# Altium PCB CFD_Chip_Test.PcbDoc (part 1 of 2)
Units mil, origin at the board's own origin, x right, y up, seen from the top; angles counter-clockwise.
Board outline 3410 x 4065 mil, 4 copper layers (Top Layer, Top Plane, Bottom Plane, Bottom Layer), stack 61.356 mil thick; 119 components, 105 nets, 482 pads, 105 vias.
Unrouted connection lines stored in the file: 8.
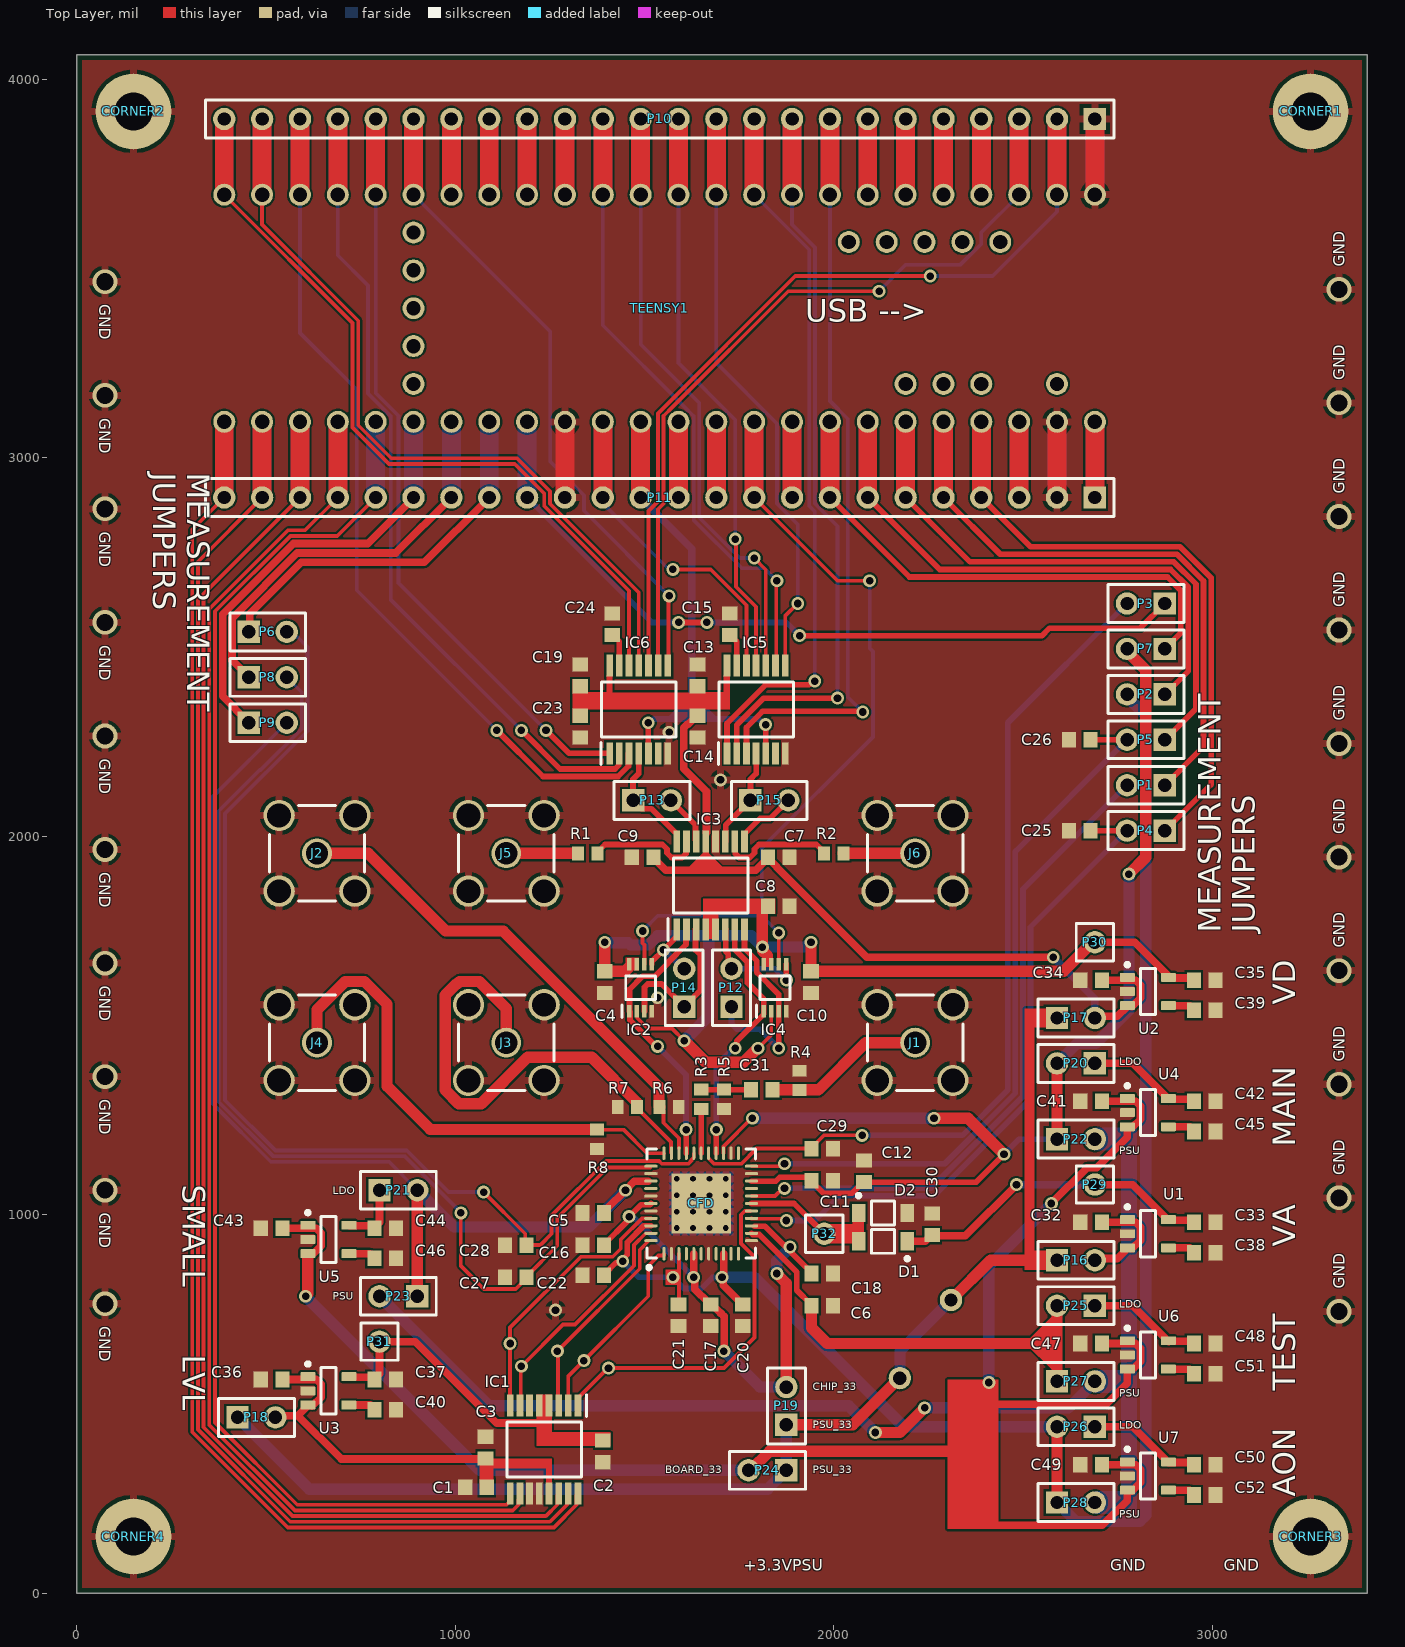
[diagram p0: Top Layer view]
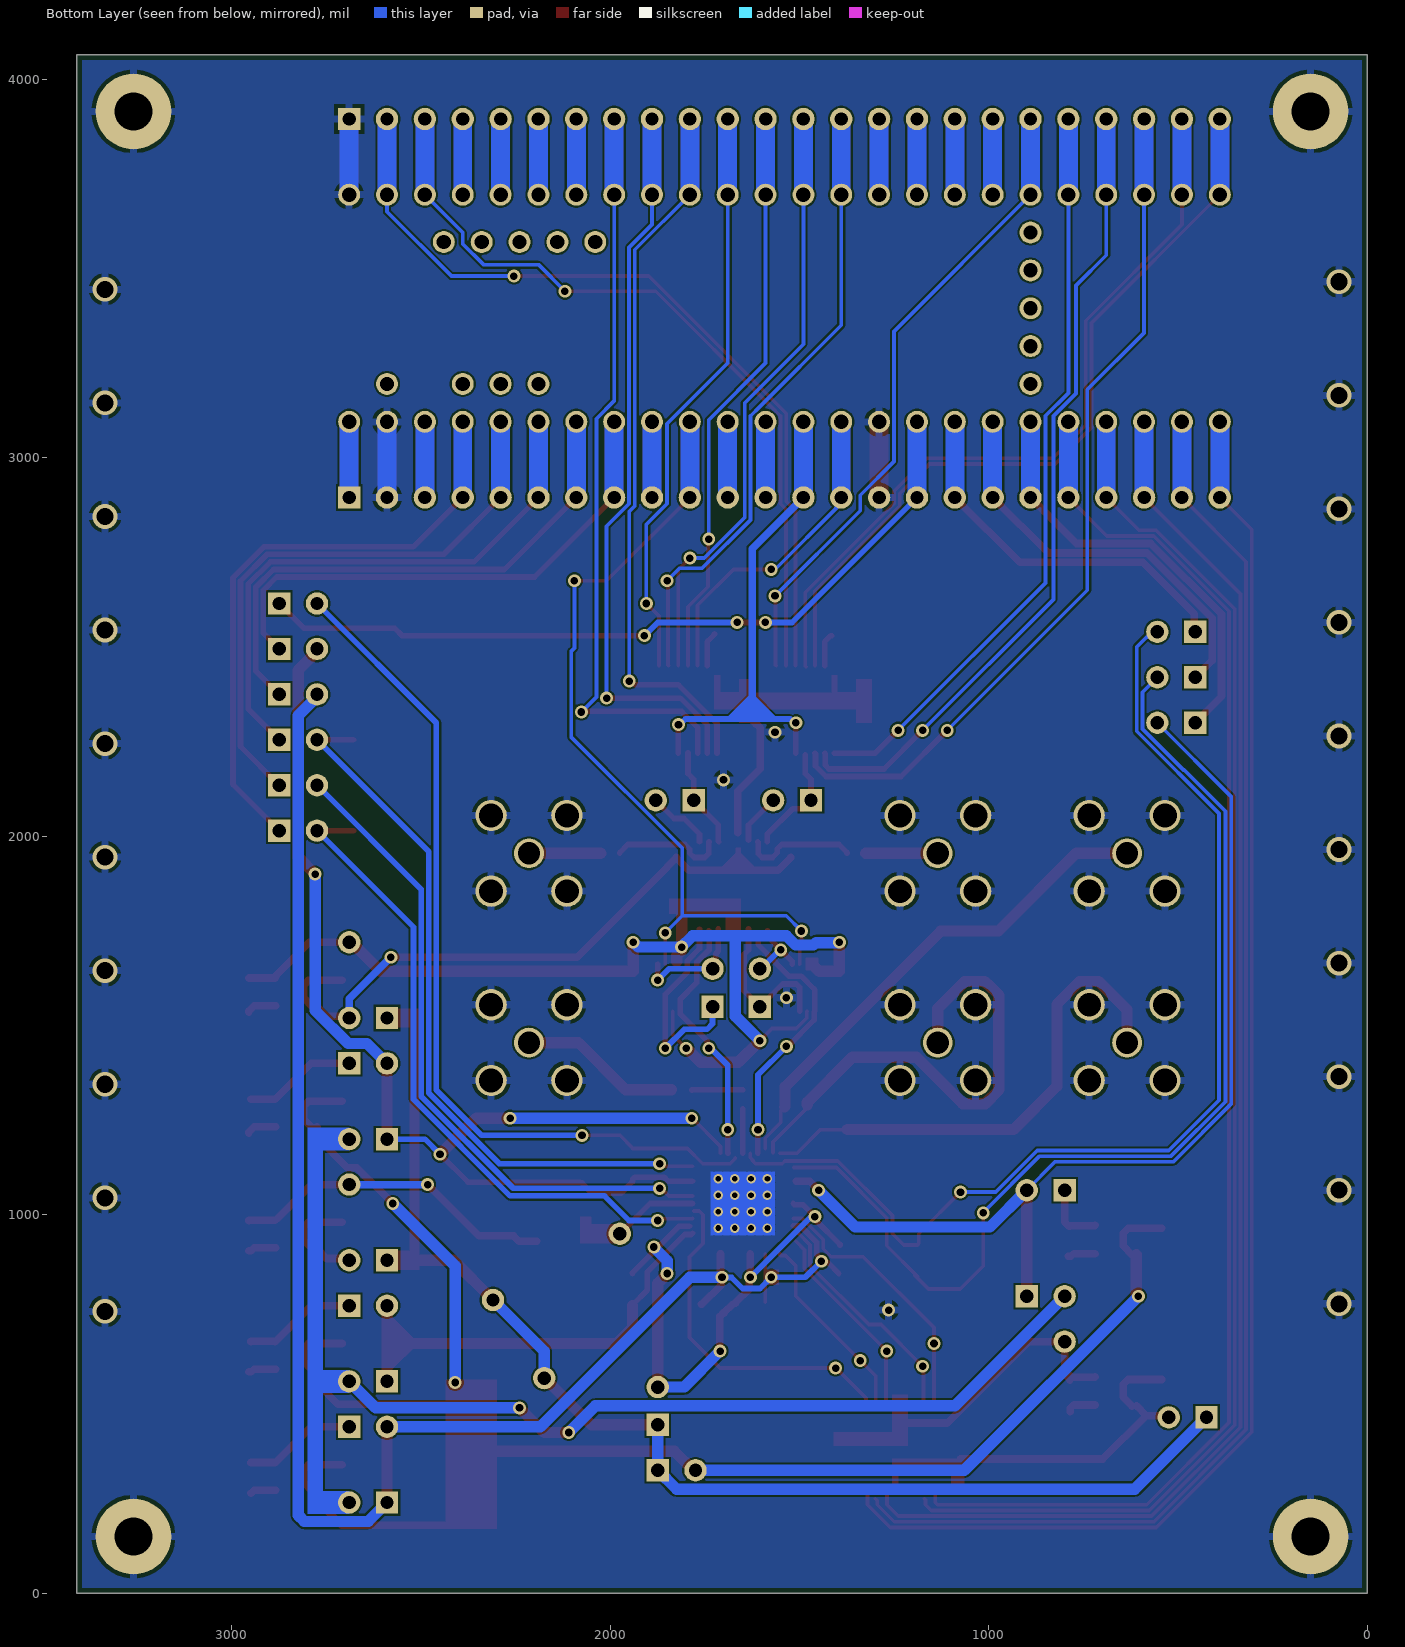
[diagram p1: Bottom Layer view, seen from below]
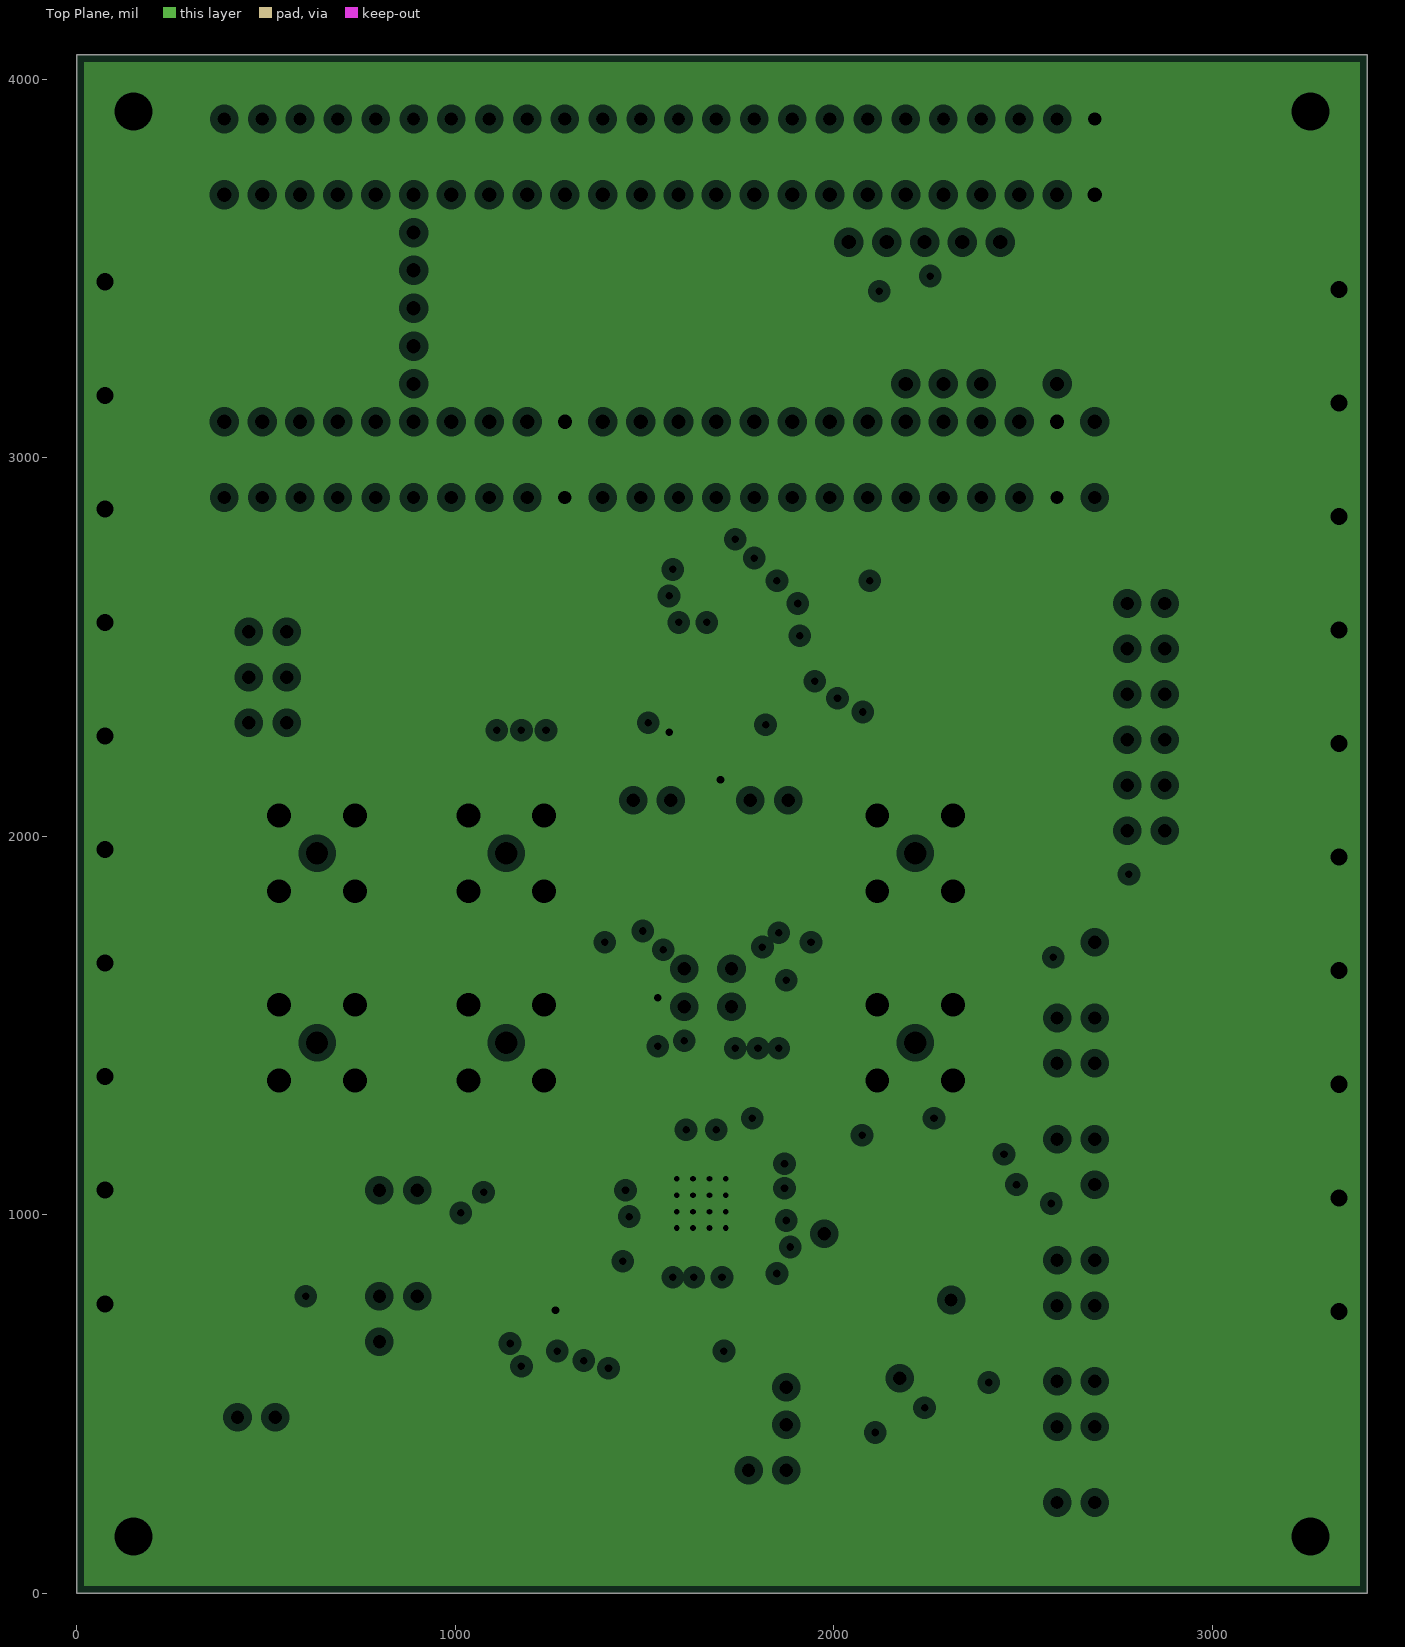
[diagram p2: Top Plane, clearances drawn from the general rule]
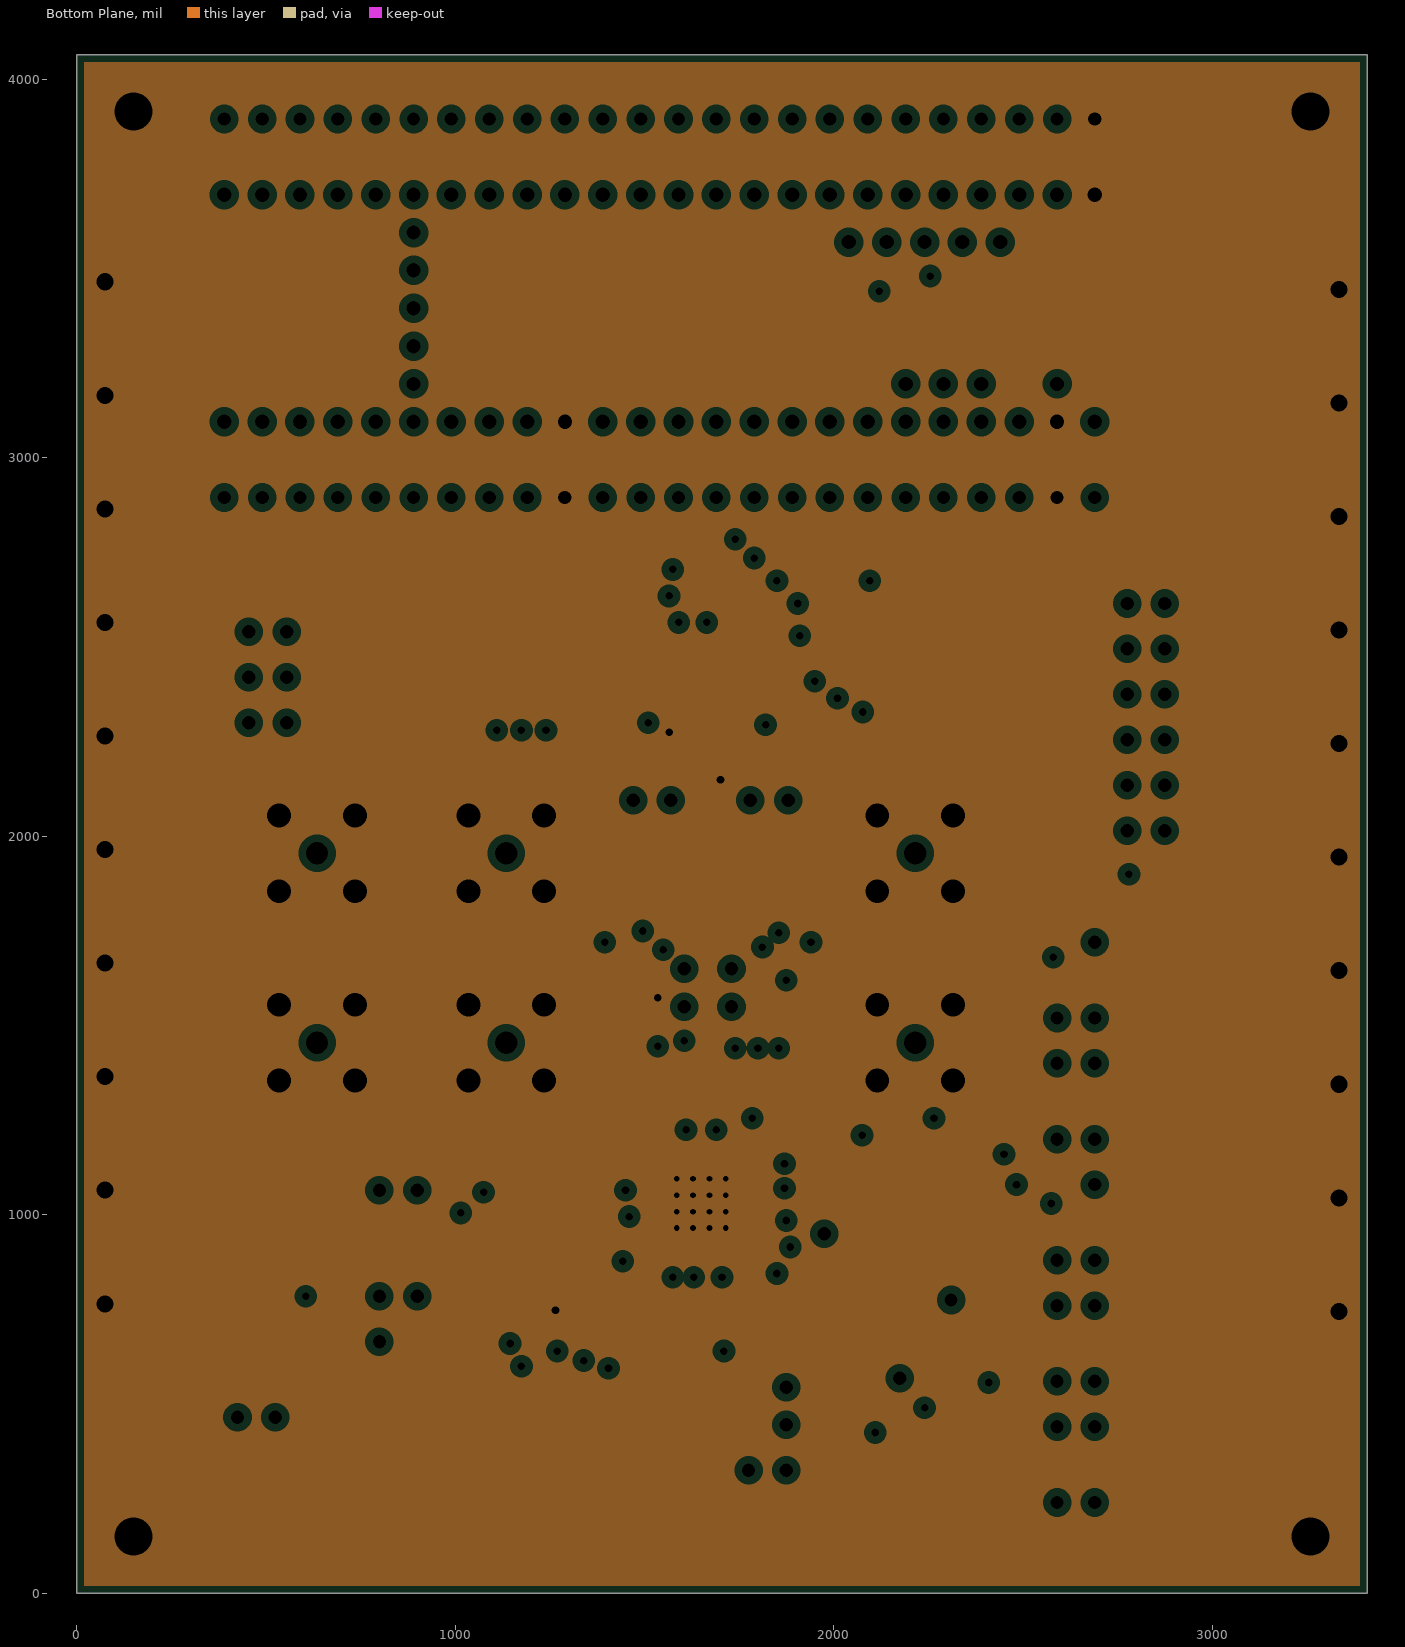
[diagram p3: Bottom Plane, clearances drawn from the general rule]
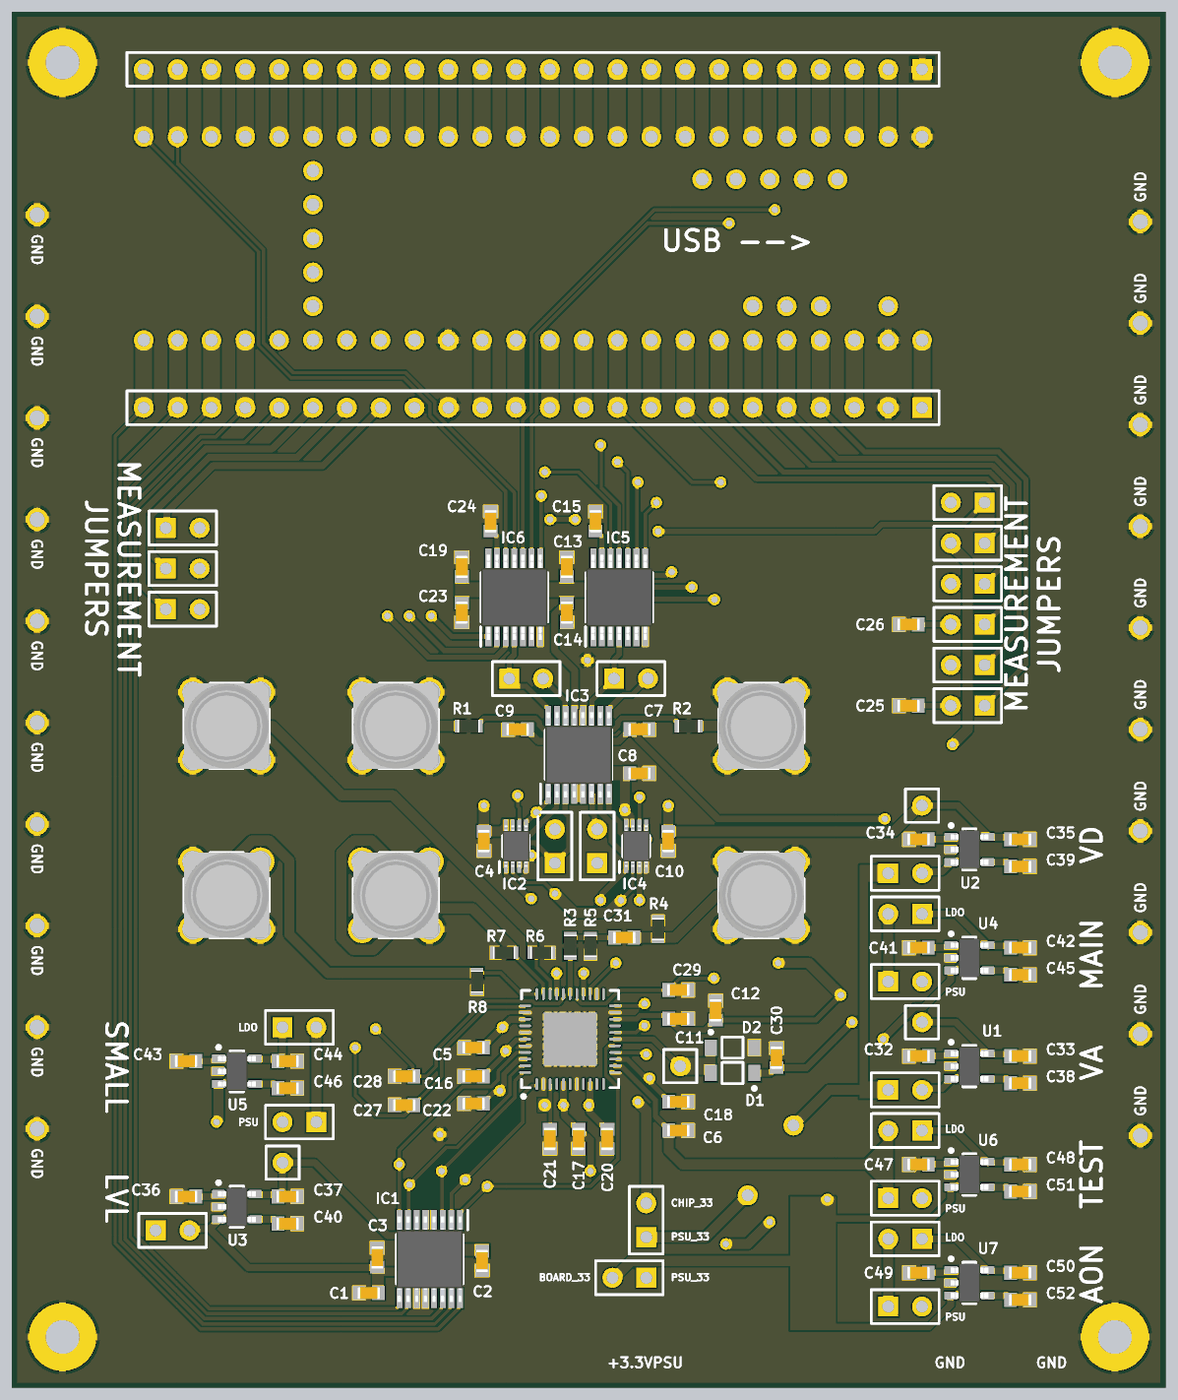
[diagram p5: 3D render of the assembled board from above, using the file's embedded part models]

## Layer stack, top to bottom
Top Solder: solder mask 0.4, Solder Resist, Dk 3.5
Top Layer: signal copper 1.4
Dielectric 4: prepreg 3.8, PP-013, Dk 4.3
Dielectric 2: prepreg 4.6, PP-016, Dk 4.4
Top Plane: plane copper 1.378, net GND
Dielectric 1: core 39, Core-042, Dk 4.6
Bottom Plane: plane copper 1.378, net GND
Dielectric 3: prepreg 4.6, PP-016, Dk 4.4
Dielectric 5: prepreg 3.8, PP-013, Dk 4.3
Bottom Layer: signal copper 1.4
Bottom Solder: solder mask 0.4, Solder Resist, Dk 3.5

## Board outline
0,0 3410,0 3410,4065 0,4065

## Design rules (kind name [scope] priority, off if disabled: settings)
AcuteAngle [All] p1: minimum=6.00000000000000E+0001 checktracksonly=FALSE
BoardOutlineClearance [All] p1: gap=15 ignorepadtopadclearanceinfootprint=FALSE
Clearance Clearance_outa_inner2 [InNamedPolygon('outa_inner2')] p1: gap=40 ignorepadtopadclearanceinfootprint=FALSE except(0: Arc-Hole Track-Hole SMDPad-Hole THPad-Hole Via-Hole Fill-Hole Poly-Hole Region-Hole Text-Hole)
Clearance Clearance_gnd_adc_vbus [InNamedPolygon('gnd_adc') vs InNet('VBUS')] p2: gap=60 ignorepadtopadclearanceinfootprint=FALSE except(0: Arc-Hole Track-Hole SMDPad-Hole THPad-Hole Via-Hole Fill-Hole Poly-Hole Region-Hole Text-Hole)
Clearance Clearance_gnd_adc [InNamedPolygon('gnd_adc')] p3: gap=20 ignorepadtopadclearanceinfootprint=FALSE except(0: Arc-Hole Track-Hole SMDPad-Hole THPad-Hole Via-Hole Fill-Hole Poly-Hole Region-Hole Text-Hole)
Clearance Clearance_dgnd [InNamedPolygon('dgnd')] p4: gap=15 ignorepadtopadclearanceinfootprint=FALSE except(0: Arc-Hole Track-Hole SMDPad-Hole THPad-Hole Via-Hole Fill-Hole Poly-Hole Region-Hole Text-Hole)
Clearance Clearance_vbus_keepout [InPolygon vs OnLayer('Keep-Out Layer')] p5: gap=20 ignorepadtopadclearanceinfootprint=FALSE except(0: Arc-Hole Track-Hole SMDPad-Hole THPad-Hole Via-Hole Fill-Hole Poly-Hole Region-Hole Text-Hole)
Clearance Clearance_vbus [InNamedPolygon('vbus')] p6: gap=60 ignorepadtopadclearanceinfootprint=FALSE except(0: Arc-Hole Track-Hole SMDPad-Hole THPad-Hole Via-Hole Fill-Hole Poly-Hole Region-Hole Text-Hole)
Clearance Clearance_gnd [InNamedPolygon('gnd')] p7: gap=10 ignorepadtopadclearanceinfootprint=FALSE except(0: Arc-Hole Track-Hole SMDPad-Hole THPad-Hole Via-Hole Fill-Hole Poly-Hole Region-Hole Text-Hole)
Clearance [All] p8: gap=5 ignorepadtopadclearanceinfootprint=FALSE except(0: Arc-Hole Track-Hole SMDPad-Hole THPad-Hole Via-Hole Fill-Hole Poly-Hole Region-Hole Text-Hole)
DiffPairsRouting [All] p1: maxlimit=25 minlimit=5 mostfreqgap=6 toplayer_minwidth=10 toplayer_maxwidth=15 toplayer_prefwidth=15 bottomlayer_minwidth=10 bottomlayer_maxwidth=15 bottomlayer_prefwidth=15 maxuncoupledlength=500
HoleSize [All] p1: absolutevalues=TRUE maxlimit=300 minlimit=10 maxpercent=80.000 minpercent=20.000
MinimumAnnularRing [All] p1: minimumring=5
MinimumSolderMaskSliver [All] p1: minsoldermaskwidth=2
PlaneClearance [All] p1: clearance=20
PlaneConnect [All] p1: planeconnectstyle=Relief reliefexpansion=5 reliefentries=4 reliefconductorwidth=10 reliefairgap=10
PolygonConnect PolygonConnect_4 [All vs IsNamedPolygon('NONET_L-01_P-001')] p1: thpad.connectstyle=Relief thpad.reliefconductorwidth=20 thpad.reliefentries=4 thpad.polygonreliefangle="90 Angle" thpad.airgapwidth=10 smdpad.connectstyle=Direct smdpad.reliefconductorwidth=10 smdpad.reliefentries=4 smdpad.polygonreliefangle="90 Angle" smdpad.airgapwidth=10 via.connectstyle=Relief via.reliefconductorwidth=20 via.reliefentries=4 via.polygonreliefangle="90 Angle" via.airgapwidth=10
PolygonConnect PolygonConnect_3 [All] p2: thpad.connectstyle=Relief thpad.reliefconductorwidth=20 thpad.reliefentries=4 thpad.polygonreliefangle="90 Angle" thpad.airgapwidth=10 smdpad.connectstyle=Direct smdpad.reliefconductorwidth=10 smdpad.reliefentries=4 smdpad.polygonreliefangle="90 Angle" smdpad.airgapwidth=10 via.connectstyle=Relief via.reliefconductorwidth=20 via.reliefentries=4 via.polygonreliefangle="90 Angle" via.airgapwidth=10
PolygonConnect PolygonConnect_2 [All vs IsNamedPolygon('NONET_L-01_P-001')] p3: thpad.connectstyle=Relief thpad.reliefconductorwidth=10 thpad.reliefentries=4 thpad.polygonreliefangle="90 Angle" thpad.airgapwidth=10 smdpad.connectstyle=Direct smdpad.reliefconductorwidth=10 smdpad.reliefentries=4 smdpad.polygonreliefangle="90 Angle" smdpad.airgapwidth=10 via.connectstyle=Relief via.reliefconductorwidth=20 via.reliefentries=4 via.polygonreliefangle="90 Angle" via.airgapwidth=10
PolygonConnect PolygonConnect_1 [All vs IsNamedPolygon('NONET_L-01_P-001')] p4: thpad.connectstyle=Relief thpad.reliefconductorwidth=10 thpad.reliefentries=4 thpad.polygonreliefangle="90 Angle" thpad.airgapwidth=10 smdpad.connectstyle=Direct smdpad.reliefconductorwidth=10 smdpad.reliefentries=4 smdpad.polygonreliefangle="90 Angle" smdpad.airgapwidth=10 via.connectstyle=Relief via.reliefconductorwidth=20 via.reliefentries=4 via.polygonreliefangle="90 Angle" via.airgapwidth=10
PolygonConnect [All] p5: connectstyle=Relief reliefconductorwidth=6 reliefentries=4 polygonreliefangle="90 Angle" airgapwidth=6
RoutingVias [All] p1: holewidth=12 width=24 viastyle="Through Hole" minholewidth=10 minwidth=22 maxholewidth=200 maxwidth=200
SilkToSilkClearance [All] p1: silktosilkclearance=5
SilkToSolderMaskClearance [IsPad] p1: minsilkscreentomaskgap=3 clearancetoexposedcopper=FALSE
SolderMaskExpansion [All] p1: expansion=2.2 istentingtop=FALSE
Width [All] p1: maxlimit=1000 minlimit=5 preferedwidth=10 minimp=50.000000 maximp=50.000000 favimp=50.000000
23 further rules are at their usual default settings.

## Classes and differential pairs
component class Teensy_Interface: C1 C2 C3 IC1 P1 P2 P3 P4 P5 P6 P7 P8 P9 P10 P11 TEENSY1
component class Power: C32 C33 C34 C35 C36 C37 C38 C39 C40 C41 C42 C43 C44 C45 C46 C47 C48 C49 C50 C51 C52 CORNER1 CORNER2 CORNER3 CORNER4 P16 P17 P18 P20 P21 P22 P23 P24 P25 P26 P27 P28 P29 P30 P31 U1 U2 U3 U4 U5 U6 U7
component class Chip_Inputs: C30 C31 D1 D2 J1 J2 J3 J4 P32 R3 R4 R5 R6 R7 R8
component class Chip: C4 C5 C6 C7 C8 C9 C10 C11 C12 C13 C14 C15 C16 C17 C18 C19 C20 C21 C22 C23 C24 C25 C26 C27 C28 C29 CFD IC2 IC3 IC4 IC5 IC6 J5 J6 P12 P13 P14 P15 R1 R2

## Components (designator, comment, footprint, x,y, rotation, side; value= is the part's Value field where it differs from the comment)
C1 "1uF" CAPC1608X90X35ML10T15 1055,280 r0 top
C2 "100nF" CAPC1608X90X35ML10T15 1390,375 r270 top
C3 "100nF" CAPC1608X90X35ML10T15 1080,385 r270 top
C4 "10nF" CAPC1608X90X35ML10T15 1395,1615 r90 top
C5 "10nF" CAPC1608X90X35ML10T15 1365,1005 r0 top
C6 "10nF" CAPC1608X90X35ML10T15 1970,760 r0 top
C7 "10nF" CAPC1608X90X35ML10T15 1855,1945 r180 top
C8 "100nF" CAPC1608X90X35ML10T15 1855,1815 r180 top
C9 "100nF" CAPC1608X90X35ML10T15 1495,1945 r0 top
C10 "10nF" CAPC1608X90X35ML10T15 1940,1615 r90 top
C11 "10nF" CAPC1608X90X35ML10T15 1970,1090 r180 top
C12 "10nF" CAPC1608X90X35ML10T15 2080,1115 r270 top
C13 "1uF" CAPC1608X90X35ML10T15 1640,2425 r90 top
C14 "100nF" CAPC1608X90X35ML10T15 1640,2290 r270 top
C15 "1uF" CAPC1608X90X35ML10T15 1725,2560 r90 top
C16 "10nF" CAPC1608X90X35ML10T15 1365,920 r0 top
C17 "10nF" CAPC1608X90X35ML10T15 1675,735 r90 top
C18 "10nF" CAPC1608X90X35ML10T15 1970,845 r180 top
C19 "1uF" CAPC1608X90X35ML10T15 1330,2425 r90 top
C20 "10nF" CAPC1608X90X35ML10T15 1760,735 r90 top
C21 "10nF" CAPC1608X90X35ML10T15 1590,735 r90 top
C22 "10nF" CAPC1608X90X35ML10T15 1365,840 r0 top
C23 "100nF" CAPC1608X90X35ML10T15 1330,2290 r270 top
C24 "1uF" CAPC1608X90X35ML10T15 1415,2560 r90 top
C25 "(10nF)" CAPC1608X90X35ML10T15 2650,2015 r0 top
C26 "(10nF)" CAPC1608X90X35ML10T15 2650,2255 r0 top
C27 "(10nF)" CAPC1608X90X35ML10T15 1160,835 r0 top
C28 "(10nF)" CAPC1608X90X35ML10T15 1160,920 r0 top
C29 "(10nF)" CAPC1608X90X35ML10T15 1970,1175 r180 top
C30 "10nF" CAPC1608X90X35ML10T15 2260,975 r270 top
C31 "2pF-20pF" CAPC1608X90X35ML10T15 1810,1330 r0 top
C32 "(Value)" CAPC1608X90X35ML10T15 2680,980 r180 top
C33 "(Value)" CAPC1608X90X35ML10T15 2980,980 r0 top
C34 "(Value)" CAPC1608X90X35ML10T15 2680,1620 r180 top
C35 "(Value)" CAPC1608X90X35ML10T15 2980,1620 r0 top
C36 "(Value)" CAPC1608X90X35ML10T15 515,565 r180 top
C37 "(Value)" CAPC1608X90X35ML10T15 815,565 r0 top
C38 "(Value)" CAPC1608X90X35ML10T15 2980,900 r0 top
C39 "(Value)" CAPC1608X90X35ML10T15 2980,1540 r0 top
C40 "(Value)" CAPC1608X90X35ML10T15 815,485 r0 top
C41 "(Value)" CAPC1608X90X35ML10T15 2680,1300 r180 top
C42 "(Value)" CAPC1608X90X35ML10T15 2980,1300 r0 top
C43 "(Value)" CAPC1608X90X35ML10T15 515,965 r180 top
C44 "(Value)" CAPC1608X90X35ML10T15 815,965 r0 top
C45 "(Value)" CAPC1608X90X35ML10T15 2980,1220 r0 top
C46 "(Value)" CAPC1608X90X35ML10T15 815,885 r0 top
C47 "(Value)" CAPC1608X90X35ML10T15 2680,660 r180 top
C48 "(Value)" CAPC1608X90X35ML10T15 2980,660 r0 top
C49 "(Value)" CAPC1608X90X35ML10T15 2680,340 r180 top
C50 "(Value)" CAPC1608X90X35ML10T15 2980,340 r0 top
C51 "(Value)" CAPC1608X90X35ML10T15 2980,580 r0 top
C52 "(Value)" CAPC1608X90X35ML10T15 2980,260 r0 top
CFD "CFD_package" QFN50P700X700X80_HS-45N_WIDEVIAS 1650,1030 r90 top
CORNER1 "Corner Mount" CornerMount 3260,3915 r90 top
CORNER2 "Corner Mount" CornerMount 150,3915 r90 top
CORNER3 "Corner Mount" CornerMount 3260,150 r90 top
CORNER4 "Corner Mount" CornerMount 150,150 r90 top
D1 "" ONSC-SOD-123-2-425-04_V 2130,930 r180 top
D2 "" ONSC-SOD-123-2-425-04_V 2130,1005 r0 top
IC1 "MAX13003EEUE+" SOP65P640X110-16N 1235,380 r270 top
IC2 "NL17SZ74USG" SOP50P310X90-8N 1490,1600 r90 top
IC3 "MAX13003EEUE+" SOP65P640X110-16N 1675,1870 r90 top
IC4 "NL17SZ74USG" SOP50P310X90-8N 1845,1600 r90 top
IC5 "TDC7200PWR" SOP65P640X120-14N 1795,2335 r90 top
IC6 "TDC7200PWR" SOP65P640X120-14N 1485,2335 r90 top
J1 "5-1814832-1" TECO-5-1814832-1_V 2215,1455 r0 top
J2 "5-1814832-1" TECO-5-1814832-1_V 635,1955 r0 top
J3 "5-1814832-1" TECO-5-1814832-1_V 1135,1455 r0 top
J4 "5-1814832-1" TECO-5-1814832-1_V 635,1455 r0 top
J5 "5-1814832-1" TECO-5-1814832-1_V 1135,1955 r0 top
J6 "5-1814832-1" TECO-5-1814832-1_V 2215,1955 r0 top
P1 "Header 2" HDR1X2 2875,2135 r180 top
P2 "Header 2" HDR1X2 2875,2375 r180 top
P3 "Header 2" HDR1X2 2875,2615 r180 top
P4 "Header 2" HDR1X2 2875,2015 r180 top
P5 "Header 2" HDR1X2 2875,2255 r180 top
P6 "Header 2" HDR1X2 455,2540 r0 top
P7 "Header 2" HDR1X2 2875,2495 r180 top
P8 "Header 2" HDR1X2 455,2420 r0 top
P9 "Header 2" HDR1X2 455,2300 r0 top
P10 "Header 24" HDR1X24 2690,3895 r180 top
P11 "Header 24" HDR1X24 2690,2895 r180 top
P12 "Header 2" HDR1X2 1730,1550 r90 top
P13 "Header 2" HDR1X2 1470,2095 r0 top
P14 "Header 2" HDR1X2 1605,1550 r90 top
P15 "Header 2" HDR1X2 1780,2095 r0 top
P16 "Header 2" HDR1X2 2590,880 r0 top
P17 "Header 2" HDR1X2 2590,1520 r0 top
P18 "Header 2" HDR1X2 425,465 r0 top
P19 "Header 2" HDR1X2 1875,445 r90 top
P20 "Header 2" HDR1X2 2690,1400 r180 top
P21 "Header 2" HDR1X2 800,1065 r0 top
P22 "Header 2" HDR1X2 2590,1200 r0 top
P23 "Header 2" HDR1X2 900,785 r180 top
P24 "Header 2" HDR1X2 1875,325 r180 top
P25 "Header 2" HDR1X2 2690,760 r180 top
P26 "Header 2" HDR1X2 2690,440 r180 top
P27 "Header 2" HDR1X2 2590,560 r0 top
P28 "Header 2" HDR1X2 2590,240 r0 top
P29 "Header 1" Header1 2690,1080 r0 top
P30 "Header 1" Header1 2690,1720 r0 top
P31 "Header 1" Header1 800,665 r0 top
P32 "Header 1" Header1 1975,950 r0 top
R1 "(<50Ohm)" RESC1609X50X30NL8T20 1350,1955 r0 top
R2 "(<50Ohm)" RESC1609X50X30NL8T20 2000,1955 r180 top
R3 "(0/50Ohm)" RESC1609X50X30NL8T20 1650,1305 r90 top
R4 "(50Ohm)" RESC1609X50X30NL8T20 1910,1355 r270 top
R5 "(50Ohm)" RESC1609X50X30NL8T20 1710,1305 r90 top
R6 "(50Ohm)" RESC1609X50X30NL8T20 1565,1285 r180 top
R7 "(50Ohm)" RESC1609X50X30NL8T20 1455,1285 r0 top
R8 "(50Ohm)" RESC1609X50X30NL8T20 1375,1200 r90 top
TEENSY1 "TEENSY_3.5/3.6" TEENSY_3.5/3.6 1590,3395 r180 top
U1 "TPS73218DBVT" DBV0005A_N 2830,950 r0 top
U2 "TPS73218DBVT" DBV0005A_N 2830,1590 r0 top
U3 "TPS73218DBVT" DBV0005A_N 665,535 r0 top
U4 "TPS73218DBVT" DBV0005A_N 2830,1270 r0 top
U5 "TPS73218DBVT" DBV0005A_N 665,935 r0 top
U6 "TPS73218DBVT" DBV0005A_N 2830,630 r0 top
U7 "TPS73218DBVT" DBV0005A_N 2830,310 r0 top

## Footprints (in the part's own frame and the unit in brackets; to place one, negate y for a bottom-side part, rotate by r counter-clockwise, add the part's x,y. Pads: shape width x height; smd on the part's side, far side on the other; paste and mask are expansions set on the pad)
CAPC1608X90X35ML10T15 [mm] "Chip Capacitor, 2-Leads, Body 1.7x0.9mm, IPC Low Density"
  rect 0.95x1.05 smd: 1(-0.725,0) 2(0.725,0)
  body extent -0.85,-0.45 0.85,0.45, height 0.9
CornerMount [mil] "Ideally grounded mounting hole for board corners. 150mil distance."
  round 200 hole 100: 1(0,0)
DBV0005A_N [mm] "SOT23, 5-Leads, Body 3.05x1.75mm, Pitch 0.95mm, IPC Medium Density"
  rrect17% 1x0.6 smd: 1(-1.375,0.95) 2(-1.375,0) 3(-1.375,-0.95) 4(1.375,-0.95) 5(1.375,0.95)
  silkscreen extent -1.5,-1.55 0.5,1.92, body extent -1.42,-1.46 1.42,1.46, height 1.08
HDR1X2 [mm] "Connector; Header; 2 Position"
  rect 1.5x1.5 hole 0.9: 1(0,0)
  round 1.5 hole 0.9: 2(2.54,0)
  silkscreen extent -1.27,-1.27 3.81,1.27
HDR1X24 [mm] "Connector; Header; 24 Position"
  rect 1.5x1.5 hole 0.9: 1(0,0)
  round 1.5 hole 0.9: 2(2.54,0) 3(5.08,0) 4(7.62,0) 5(10.16,0) 6(12.7,0) 7(15.24,0) 8(17.78,0) 9(20.32,0) 10(22.86,0) 11(25.4,0) 12(27.94,0) 13(30.48,0) 14(33.02,0) 15(35.56,0) 16(38.1,0) 17(40.64,0) 18(43.18,0) 19(45.72,0) 20(48.26,0) 21(50.8,0) 22(53.34,0) 23(55.88,0) 24(58.42,0)
  silkscreen extent -1.27,-1.27 59.69,1.27
Header1 [mm] "Single header connection"
  round 1.5 hole 0.9 mask+0.056: 1(0,0)
  silkscreen extent -1.25,-1.25 1.25,1.25
ONSC-SOD-123-2-425-04_V [mm] "SOD, 2-Leads, Body 2.69x1.6mm"
  rect 0.91x1.22 smd: 1(-1.635,0) 2(1.635,0)
  silkscreen extent -1.76,-0.8 0.78,1.28, body extent -1.35,-0.8 1.35,0.8, height 1.35
QFN50P700X700X80_HS-45N_WIDEVIAS [mm] "QFN, 44-Leads, Body 7.00x7.00mm, Pitch 0.50mm, Thermal Pad 4.00x4.00mm, IPC Medium Density"
  oval 0.9x0.2 smd: 1(-3.375,2.5) 2(-3.375,2) 3(-3.375,1.5) 4(-3.375,1) 5(-3.375,0.5) 6(-3.375,0) 7(-3.375,-0.5) 8(-3.375,-1) 9(-3.375,-1.5) 10(-3.375,-2) 11(-3.375,-2.5) 23(3.375,-2.5) 24(3.375,-2) 25(3.375,-1.5) 26(3.375,-1) 27(3.375,-0.5) 28(3.375,0) 29(3.375,0.5) 30(3.375,1) 31(3.375,1.5) 32(3.375,2) 33(3.375,2.5)
  oval 0.2x0.9 smd: 12(-2.5,-3.375) 13(-2,-3.375) 14(-1.5,-3.375) 15(-1,-3.375) 16(-0.5,-3.375) 17(0,-3.375) 18(0.5,-3.375) 19(1,-3.375) 20(1.5,-3.375) 21(2,-3.375) 22(2.5,-3.375) 34(2.5,3.375) 35(2,3.375) 36(1.5,3.375) 37(1,3.375) 38(0.5,3.375) 39(0,3.375) 40(-0.5,3.375) 41(-1,3.375) 42(-1.5,3.375) 43(-2,3.375) 44(-2.5,3.375)
  rect 4x4 smd: 35(0,0)
  silkscreen extent -4.42,-3.65 3.65,3.65, body extent -3.5,-3.5 3.5,3.5, height 0.8
RESC1609X50X30NL8T20 [mm] "Chip Resistor, 2-Leads, Body 1.65x0.95mm, IPC Medium Density"
  rect 0.8x0.95 smd: 1(-0.65,0) 2(0.65,0)
  body extent -0.82,-0.48 0.82,0.48, height 0.5
SOP50P310X90-8N [mm]
  rect 0.85x0.3 smd: 1(-1.575,0.75) 2(-1.575,0.25) 3(-1.575,-0.25) 4(-1.575,-0.75) 5(1.575,-0.75) 6(1.575,-0.25) 7(1.575,0.25) 8(1.575,0.75)
  silkscreen extent -2,-1 0.8,1.25, body extent -1.55,-1 1.55,1, height 0.9
SOP65P640X110-16N [mm]
  rect 1.475x0.45 smd: 1(-2.938,2.275) 2(-2.938,1.625) 3(-2.938,0.975) 4(-2.938,0.325) 5(-2.938,-0.325) 6(-2.938,-0.975) 7(-2.938,-1.625) 8(-2.938,-2.275) 9(2.938,-2.275) 10(2.938,-1.625) 11(2.938,-0.975) 12(2.938,-0.325) 13(2.938,0.325) 14(2.938,0.975) 15(2.938,1.625) 16(2.938,2.275)
  silkscreen extent -3.67,-2.5 1.85,2.85, body extent -3.2,-2.5 3.2,2.5, height 1.1
SOP65P640X120-14N [mm]
  rect 1.475x0.45 smd: 1(-2.938,1.95) 2(-2.938,1.3) 3(-2.938,0.65) 4(-2.938,0) 5(-2.938,-0.65) 6(-2.938,-1.3) 7(-2.938,-1.95) 8(2.938,-1.95) 9(2.938,-1.3) 10(2.938,-0.65) 11(2.938,0) 12(2.938,0.65) 13(2.938,1.3) 14(2.938,1.95)
  silkscreen extent -3.67,-2.5 1.85,2.52, body extent -3.2,-2.5 3.2,2.5, height 1.13
TECO-5-1814832-1_V [mm] "THD, 5-Leads, Body 6.4x6.4mm, Pitch 5.08mm"
  round 2 hole 1.5: 1(0,0)
  round 2.1 hole 1.6: 2(-2.54,2.54) 3(-2.54,-2.54) 4(2.54,-2.54) 5(2.54,2.54)
  silkscreen extent -3.2,-3.2 3.2,3.2, body extent -3.21,-3.21 3.19,3.19, height 9.5
TEENSY_3.5/3.6 [mil]
  round 58 / inner round 60 / far side round 58 hole 38: 0/RX(-1000,-300) 1/TX(-900,-300) 2(-800,-300) 3/CANTX(-700,-300) 3V3(300,-300) 3V3_2(700,-100) 3V3_LO(-900,300) 4/CANRX(-600,-300) 5(-500,-300) 6(-400,-300) 7(-300,-300) 8(-200,-300) 9/CS(-100,-300) 10/CS(0,-300) 11/MOSI(100,-300) 12/MISO(200,-300) 13/SCK(200,300) 14/A0(100,300) 15/A1(0,300) 16/A2(-100,300) 17/A3(-200,300) 18/A4/SDA(-300,300) 19/A5/SCL(-400,300) 20/A6(-500,300) 21/A7(-600,300) 21/DAC0(500,300) 22/A8(-700,300) 23/A9(-800,300) 24(400,-300) 25(500,-300) 26(600,-300) 27(700,-300) 28(800,-300) 29(900,-300) 30(1000,-300) 31/A12(1100,-300) 32/A13(1200,-300) 33/A14(1200,300) 34/A15(1100,300) 35/A16(1000,300) 36/A17(900,300) 37/A18(800,300) 38/A19(700,300) 39/A20(600,300) A10(-700,200) A11(-600,200) A22/DAC1(400,300) AGND(-1000,300) AREF(-800,200) GND(-1100,-300) GND2(300,300) GND3(700,0) PROG(700,100) RESET(700,200) U5V(-850,-175) UD+(-650,-175) UD-(-750,-175) UGND1(-550,-175) UGND2(-450,-175) VBAT(700,-200) VIN(-1100,300) VUSB(-1000,200)

## Part data
C1 C2 C3 C4 C5 C6 C7 C8 C9 C10 C11 C12 C13 C14 C15 C16 C17 C18 C19 C20 C21 C22 C23 C24 C25 C26 C27 C28 C29 C30 C31 C32 C33 C34 C35 C36 C37 C38 C39 C40 C41 C42 C43 C44 C45 C46 C47 C48 C49 C50 C51 C52: library part CMP-2000-04945-1, "0603", Capacitance=22pF, Dielectric=C0G, Manufacturer=Murata, Package Description="2-Pin Surface Mount Device, Body 1.6 x 0.8 mm", Package Reference=603, Rated Voltage=50V, Tolerance (%)=±5%, Case Size/Dimension=0603, Datasheet URL=https://datasheet.ciiva.com/11786/0900766b807a1cab-11786398.pdf, Datasheet Version=Jul-06, Manufacturer URL=http://www.murata.com/
D1 D2: library part CMP-1060-00509-1, "Zener Voltage Regulator, 2-Pin SOD-123, Pb-Free, Tape and Reel", Manufacturer="On Semiconductor", PartNumber=MMSZ4679T1G, ComponentLink1Description="Manufacturer URL", ComponentLink1URL=http://www.onsemi.com/, ComponentLink2Description=Datasheet, ComponentLink2URL=http://www.onsemi.com/pub_link/Collateral/MMSZ4678T1-D.PDF, ComponentLink3Description="Package Specification", ComponentLink3URL=http://www.onsemi.com/pub_link/Collateral/425-04.PDF, DatasheetVersion="Rev. 9", Mounting Technology="Surface Mount", P Max (W)=0.5, PackageDescription="2-Pin SOD, Body 1.6 x 2.69 mm", PackageReference=SOD-123-2-425-04, PackageVersion="Rev. G, 10/2009", Packing="Tape and Reel", RoHS=Pb-Free, VZ Typ (V)=2
IC1 IC3: "Integrated Circuit", Manufacturer_Name="Maxim Integrated", Datasheet Link=https://pdfserv.maximintegrated.com/en/ds/MAX13000E-MAX13005E.pdf, Height=1.1mm, Manufacturer_Part_Number=MAX13003EEUE+
IC2 IC4: "Flip Flops 1.65-5.5V CMOS Single D-Type", Manufacturer_Name="ON Semiconductor", Datasheet Link=http://www.onsemi.com/pub/Collateral/NL17SZ74-D.PDF, Height=0.9mm, Manufacturer_Part_Number=NL17SZ74USG
IC5 IC6: "Integrated Circuit", Manufacturer_Name="Texas Instruments", Datasheet Link=http://www.ti.com/lit/gpn/tdc7200, Height=1.2mm, Manufacturer_Part_Number=TDC7200PWR
J1 J2 J3 J4 J5 J6: library part CMP-2000-05415-1, "SMA Connector, Pitch 5.08 mm, 1 Position, Height 9.5 mm, Tail Length 4 mm, -65 to 165 degC, RoHS, Bulk", Frequency Max=3GHz, Manufacturer="TE Connectivity", Package Description="SMA Connector, Pitch 5.08 mm, 1 Position, Height 9.5 mm, Tail Length 4 mm", Coaxial Cable Types=-, Coaxial Termination=Solder, Connector Body Style=StraightJack, Connector Mounting=PCBMount, Connector Type=SMACoaxial, Contact Material=BerylliumCopper, Contact Plating=GoldPlatedContacts, Datasheet URL=http://www.onlinecomponents.com/productFiles/mf-AMP/eng_cd_1814832_a.pdf, Datasheet Version="Rev. B1, 03/2011", Impedance=50ohm, Manufacturer URL=http://www.te.com/, Package Reference=5-1814832-1, Product Range=ZDCSeries, SVHC=NoSVHC(15-Jun-2015)
P1 P2 P3 P4 P5 P6 P7 P8 P9 P12 P13 P14 P15 P16 P17 P18 P19 P20 P21 P22 P23 P24 P25 P26 P27 P28: "Header, 2-Pin", LatestRevisionDate=17-Jul-2002, LatestRevisionNote="Re-released for DXP Platform.", Publisher="Altium Limited"
P10 P11: "Header, 24-Pin", LatestRevisionDate=17-Jul-2002, LatestRevisionNote="Re-released for DXP Platform.", Publisher="Altium Limited"
R1 R2 R3 R4 R5 R6 R7 R8: library part CMP-2000-03816-5, "0603", Manufacturer="Vishay Semiconductor", Max Operating Temperature="155 degC", Min Operating Temperature="-55 degC", Package Quantity=5000, Voltage Rating="75 V", ComponentLink1Description="Manufacturer URL", ComponentLink1URL=http://www.vishay.com/, ComponentLink2Description=Datasheet, ComponentLink2URL=http://www.vishay.com/docs/20035/dcrcwe3.pdf, DatasheetVersion=06/2012, Height="0.45 mm", Length="1.55 mm", Mount="Surface Mount", Mounting Technology="Surface Mount", PackageDescription="2-Pin Surface Mount Device, Body 1.575 x 0.85 mm", PackageReference=0603, Packaging="Tape and Reel", Pins=2, REACH SVHC=Unknown, RoHSCompliant=true
U1 U2 U3 U4 U5 U6 U7: library part CMP-0394-00378-2, "Single Output Fast Transient Response LDO, 200 mA, Fixed 1.8 V Output, 1.7 to 5.5 V Input, with Reverse Current Protection, 5-pin SOT-23 (DBV), -40 to 85 degC, Green (RoHS & no Sb/Br)", Manufacturer="Texas Instruments", Accuracy(%)=1, Code_JEDEC=MO-178, ComponentLink1Description="Manufacturer URL", ComponentLink1URL=http://www.ti.com/, ComponentLink2Description=Datasheet, ComponentLink2URL=http://www.ti.com/general/docs/lit/getliterature.tsp?genericPartNumber=TPS73218&fileType=pdf, ComponentLink3Description="Package Specification", ComponentLink3URL=http://www.ti.com/litv/pdf/mpds018i, DatasheetVersion=SBVS037O, Eco-Plan="Green (RoHS & no Sb/Br)", Fixed Output Options(V)=1.8, Iout(Max)(A)=0.25, Iq(Typ)(mA)=0.4, Mounting Technology="Surface Mount", PackageDescription="5-Pin Plastic Small Outline, Body 1.60 Ãƒâ€” 2.90 mm, Pitch 0.95 mm", PackageReference=DBV0005A, PackageVersion=4073253-4/K, PartNumber=TPS73218DBVT, SubFamily="Single Channel LDO", Vdo(Typ)(mV)=40, Vin(Max)(V)=5.5, Vin(Min)(V)=1.7, Vout Adj(Max)(V)=1.8, Vout Adj(Min)(V)=1.8
TEENSY1: DeviceSetName=TEENSY_3.5/3.6, GateName_1=G$1, LibraryName=Teensy356, Package=TEENSY_3.5/3.6, SymbolName_1=TEENSY_3.5/3.6

## Free pads (board coordinates)
  round 59.06 hole 35.43: ""(2174.74,568.66) ""(2310,775)

## Via types
v1: diameter 34, hole 20, Top Layer to Bottom Layer, 69 vias
v2: diameter 65, hole 45, Top Layer to Bottom Layer, 20 vias
v3: diameter 25, hole 15, Top Layer to Bottom Layer, 16 vias

## Nets (pads, with @x,y where several pads share a name; then routed paths per layer and width w, separated by ;. In a path a pad name is that pad's centre, name@x,y a point inside that pad or via, vN(x,y) a via of type N, cw(c..) or ccw(c..) an arc to the next point about the centre after c; other vN are vias at no path point)
+1.8VA: C30.2 C33.1 D1.1 P29.1 U1.5 | length 852.8
  Top Layer w20: D1.1@2194.37,930 2241.57,930 2255,943.43 C30.2@2255,945 ; C30.2@2260,945 2348,945 v1(2483,1080) ; P29.1@2690,1080 2790,1080 U1.5@2880,990 ; U1.5@2884.13,987.4 2885.94,985.59 2954.41,985.59 C33.1@2955,985
  Bottom Layer w20: v1(2483,1080) P29.1@2690,1080
+1.8VD: C4.2 C8.2 C10.2 C35.1 IC2.2 IC2.7 IC2.8 IC3.4 IC3.5 IC4.2 IC4.7 IC4.8 P30.1 U2.5 | length 2855.8
  Top Layer w10: IC2.2@1480.16,1537.99 1481.06,1537.09 1481.06,1519.99 1508.76,1492.29 1572.71,1492.29 v1(1605,1460) ; v1(1800,1440) 1835.16,1475.16 IC4.2@1835.16,1537.99
  Top Layer w20: P30.1@2690,1720 2795,1720 U2.5@2885,1630 ; U2.5@2884.13,1627.4 2885.94,1625.59 2954.41,1625.59 C35.1@2955,1625
  Top Layer w30: v1(1395,1720) C4.2@1395,1643.54 1448.54,1643.54 1470,1665 ; v1(1605,1460) 1662,1403 1761.92,1403 1798.92,1440 v1(1800,1440) ; C8.2@1810,1805 1811.67,1803.33 v1(1811.67,1707.43) 1812.43,1706.66 1812.43,1697.57 1825,1685 1825,1670 ; v1(1940,1720) C10.2@1940,1643.54 2607.35,1643.54 2683.8,1720 P30.1@2690,1720
  Bottom Layer w30: v1(1395,1720) 1395.77,1719.23 1456.85,1719.23 1463.26,1712.83 1510.5,1712.83 1534.67,1737 1783,1737 v1@1812.58,1707.43 ; v1(1605,1460) 1670,1525 1670,1735 ; v1(1811.67,1707.43) v1@1812.58,1707.43 ; v1(1940,1720) 1938.92,1720 1926.34,1707.43 v1@1812.58,1707.43
+1.8VD_SHIFT: C2.1 C37.1 IC1.4 IC1.5 P31.1 U3.5 | length 688.6
  Top Layer w20: U3.5@719.13,572.4 720.94,570.59 780.59,570.59 C37.1@785,575 ; C37.1@786.46,563.03 C37.1@786.46,565 ; C37.1@790,570 790,570.51 800,580.51 P31.1@800,665 895,665 1110,450 1230,450
+1.8VDDAON: C50.1 P26.1 U7.5 | length 301.2
  Top Layer w20: P26.1@2690,440 2790,440 U7.5@2885,345 ; U7.5@2884.13,347.4 2885.94,345.59 2949.41,345.59 C50.1@2950,345
+1.8VDDMAIN: C42.1 P20.1 U4.5 | length 301.2
  Top Layer w20: P20.1@2690,1400 2790,1400 U4.5@2885,1305 ; U4.5@2884.13,1307.4 2885.94,1305.59 2949.41,1305.59 C42.1@2950,1305
+1.8VDDSMALL: C44.1 P21.1 U5.5 | length 170.7
  Top Layer w20: U5.5@719.13,972.4 720.94,970.59 784.41,970.59 785,970 789.49,970 800,980.51 P21.1@800,1065
+1.8VDDTEST: C48.1 P25.1 U6.5 | length 301.2
  Top Layer w20: P25.1@2690,760 2790,760 U6.5@2885,665 ; U6.5@2884.13,667.4 2885.94,665.59 2949.41,665.59 C48.1@2950,665
+1.8VPSU: P22.2 P23.2 P27.2 P28.2 | length 2095
  Top Layer w30: v1(2110,425) 2175,425 v1(2240,490)
  Bottom Layer w30: P23.2@800,785 1089.53,495.47 2039.53,495.47 v1(2110,425) ; v1(2240,490) 2620,490 P27.2@2690,560
+3.3VA: C32.1 P16.2 U1.1 U1.3 | length 271.3
  Top Layer w20: P16.2@2690,880 2694.53,884.53 2749.53,884.53 U1.3@2775,910 ; C32.1@2708.54,980 2797.4,980 2810.55,966.85 2810.55,933.15 U1.3@2787.4,910
+3.3VCHIP: C41.1 C43.1 C47.1 C49.1 P24.2 U4.1 U4.3 U5.1 U5.3 U6.1 U6.3 U7.1 U7.3 | length 4461.9
  Top Layer w20: C43.1@543.54,965 632.4,965 645.55,951.85 645.55,918.15 622.4,895 U5.3@610,895 ; 2420,180 2710,180 2775,245 2775,271.73 U7.3@2775.87,272.6 ; 2420,500 2720,500 2775,555 2775,591.73 U6.3@2775.87,592.6 ; v1(2575,1030) 2669.53,1124.53 2694.53,1124.53 2775,1205 2775,1231.73 U4.3@2775.87,1232.6 ; C49.1@2708.54,340 2797.4,340 2810.55,326.85 2810.55,293.15 2787.4,270 U7.3@2775.87,270 ; C47.1@2708.54,660 2797.4,660 2810.55,646.85 2810.55,613.15 2792.4,595 U6.3@2775,595 ; C41.1@2708.54,1300 2797.4,1300 2810.55,1286.85 2810.55,1253.15 2787.4,1230 U4.3@2775.87,1230
  Top Layer w30: v1(605,785) 605,786.08 610.87,791.95 U5.3@610.87,894.41 ; P24.2@1775,325 1780.4,325 1830.4,375 2335,375
  Bottom Layer w30: v1(605,785) 1065,325 P24.2@1775,325 ; v1(2410,557) 2410,865 v1(2575,1030)
+3.3VD: C7.2 C9.2 C13.1 C14.1 C19.1 C23.1 C34.1 IC3.13 IC5.14 IC6.14 P17.2 U2.1 U2.3 | length 2024.9
  Top Layer w20: C9.2@1523.54,1945 1523.54,1943.03 1556.57,1910 1793.43,1910 C7.2@1826.46,1943.03 ; C14.1@1640,2318.54 1638.03,2318.54 1615.19,2295.7 1613.66,2295.7 1604.33,2286.37 1604.33,2177.99 1663.94,2118.38 IC3.13@1663.94,2010 ; C7.2@1826.46,1945 C7.2@1826.46,1943.03 ; v1(2580,1680.54) 2087.42,1680.54 1849.84,1918.12 1849.84,1919.65 C7.2@1826.46,1943.03 ; P17.2@2690,1520 2694.53,1524.53 2749.53,1524.53 U2.3@2775,1550 ; C34.1@2708.54,1620 2797.4,1620 2810.55,1606.85 2810.55,1573.15 U2.3@2787.4,1550
  Bottom Layer w20: v1(2580,1680.54) 2690,1570.54 P17.2@2690,1520
+3.3VD_SHIFT: C1.2 C3.2 C36.1 IC1.13 P18.2 U3.1 U3.3 | length 809.2
  Top Layer w20: P18.2@525,465 529.53,469.53 584.53,469.53 ; C36.1@543.54,565 632.4,565 645.55,551.85 645.55,518.15 U3.3@622.4,495 ; U3.3@610,495 584.53,469.53 ; C3.2@1075,355 699.06,355 584.53,469.53
+3.3VPSU: P16.1 P17.1 P18.1 P19.1 P24.1 pad. | length 2540
  Top Layer w30: P24.1@1870,320 P24.1@1875,325 ; P19.1@1875,445 2050,445 pad.@2173.66,568.66 ; pad.@2310,775 2415,880 2515,880
  Bottom Layer w30: P18.1@425,465 614.53,275.47 1825.47,275.47 P24.1@1875,325 P19.1@1875,445 ; P19.1@1872.52,442.52 P19.1@1872.52,445.06 ; pad.@2170,570 2175,575 2175,640 pad.@2310,775
/RST_TIME: IC2.6 IC4.6 P11.10 TEENSY1.17/A3 | length 1979.3
  Top Layer w10: v1(1495.17,1749.83) 1495.17,1717.57 1499.92,1712.83 1499.92,1662.09 IC2.6@1499.84,1662.01 ; P11.10@1790,2895 2010,2675 v1(2095,2675) ; IC4.6@1854.84,1662.01 1854.92,1662.09 1854.92,1749.92 v1@1855,1750
  Bottom Layer w10: v1(1495.17,1749.83) 1535.35,1790 1810,1790 ; v1(1855,1745) 1810,1790 ; v1(2095,2675) 2095,2497.16 2103.59,2488.57 2103.59,2262.69 1810,1969.1 1810,1790
/SCAN_IN: CFD.1 IC1.2 | length 513.7
  Top Layer w10: IC1.2@1298.98,495.67 1298.98,573.98 v1(1340,615) 1510,785 1510,865 1537.43,892.43 1550.51,892.43 1551.57,893.5 CFD.1@1551.57,897.13
/SCAN_IN_33: IC1.15 P11.23 TEENSY1.34/A15 | length 3644.7
  Top Layer w10: P11.23@490,2895 320.47,2725.47 320.47,432.69 564.13,189.04 1250.13,189.04 1295.12,234.03 1295.12,245.12 IC1.15@1300,250
/SCAN_LOAD: CFD.44 IC1.3 | length 535.1
  Top Layer w10: IC1.3@1273.39,495.67 1271.69,497.36 1271.69,638.31 v1(1270,640) 1487.5,857.5 1487.5,907.5 CFD.44@1510,930
/SCAN_LOAD_33: IC1.14 P11.22 TEENSY1.35/A16 | length 3637.2
  Top Layer w10: P11.22@590,2895 335.47,2640.47 335.47,438.9 570.34,204.04 1239.54,204.04 1269.53,234.03 1269.53,260.47 IC1.14@1273.39,264.33
/SCAN_OUT: CFD.41 IC1.8 | length 712.6
  Top Layer w10: IC1.8@1145.43,495.67 1145.22,495.89 1145.22,659.78 v1(1145,660) 1145,702.06 1332.28,889.33 1416.39,889.33 1437.5,910.44 1437.5,934.94 1493.19,990.63 CFD.41@1517.13,990.63
/SCAN_OUT_33: IC1.9 P11.20 TEENSY1.37/A18 | length 3586.7
  Top Layer w10: P11.20@790,2895 688.53,2793.53 564.53,2793.53 365.47,2594.47 365.47,2549.26 365.47,451.33 582.77,234.04 1135.72,234.04 1141.57,239.89 1141.57,260.47 IC1.9@1145.43,264.33
/SPI_CS_MAIN: IC5.11 P10.12 TEENSY1.10/CS | length 1329.2
  Top Layer w10: v1(1740,2785) 1742,2783 1742,2659.21 1795,2606.21 IC5.11@1795,2450.67
  Bottom Layer w10: TEENSY1.10/CS@1590,3695 1590,3250.15 1740,3100.15 v1(1740,2785)
/SPI_CS_SMALL: IC6.11 P10.23 TEENSY1.31/A12 | length 1854.7
  Top Layer w10: TEENSY1.31/A12@490,3695 490,3616.21 744,3362.21 744,3085.85 831.1,2998.74 1163.37,2998.74 1250.47,2911.64 1250.47,2878.63 1485,2644.1 IC6.11@1485,2450.67 1485,2449.87 IC6.11@1483.03,2447.9
/TIME_MAIN_18: IC3.8 IC4.3 P12.1 | length 548.7
  Top Layer w15: IC3.8@1764.57,1754.33 1764.57,1703.15 1797.07,1670.65 1797.07,1640.1 1854.84,1582.32 IC4.3@1854.84,1537.99 1854.92,1537.91 1854.92,1440.08 v1(1855,1440)
  Bottom Layer w15: P12.1@1730,1550 1730,1505 1745,1490 1805,1490 v1(1855,1440)
/TIME_MAIN_33: IC3.9 P15.2 | length 172.5
  Top Layer w15: IC3.9@1764.57,1985.67 1764.57,2005.85 1805.61,2046.89 1831.89,2046.89 P15.2@1880,2095
/TIME_SMALL_18: IC2.3 IC3.3 P14.1 | length 424.2
  Top Layer w15: IC2.3@1499.84,1537.99 1500,1538.15 1500,1601.21 1508.79,1610 1545,1610 P14.1@1605,1550 1647.03,1592.03 1647.03,1687.78 1635,1699.81 IC3.3@1635,1755
/TIME_SMALL_33: IC3.14 P13.2 | length 131.9
  Top Layer w15: P13.2@1570,2095 1635,2030 IC3.14@1635,1990